# Altium PCB ADS1274.PcbDoc (part 1 of 2)
Units mil, origin at the board's own origin, x right, y up, seen from the top; angles counter-clockwise.
Board outline 3553.34 x 2765.94 mil, 2 copper layers (Top Layer, Bottom Layer); 108 components, 70 nets, 358 pads, 1184 vias.
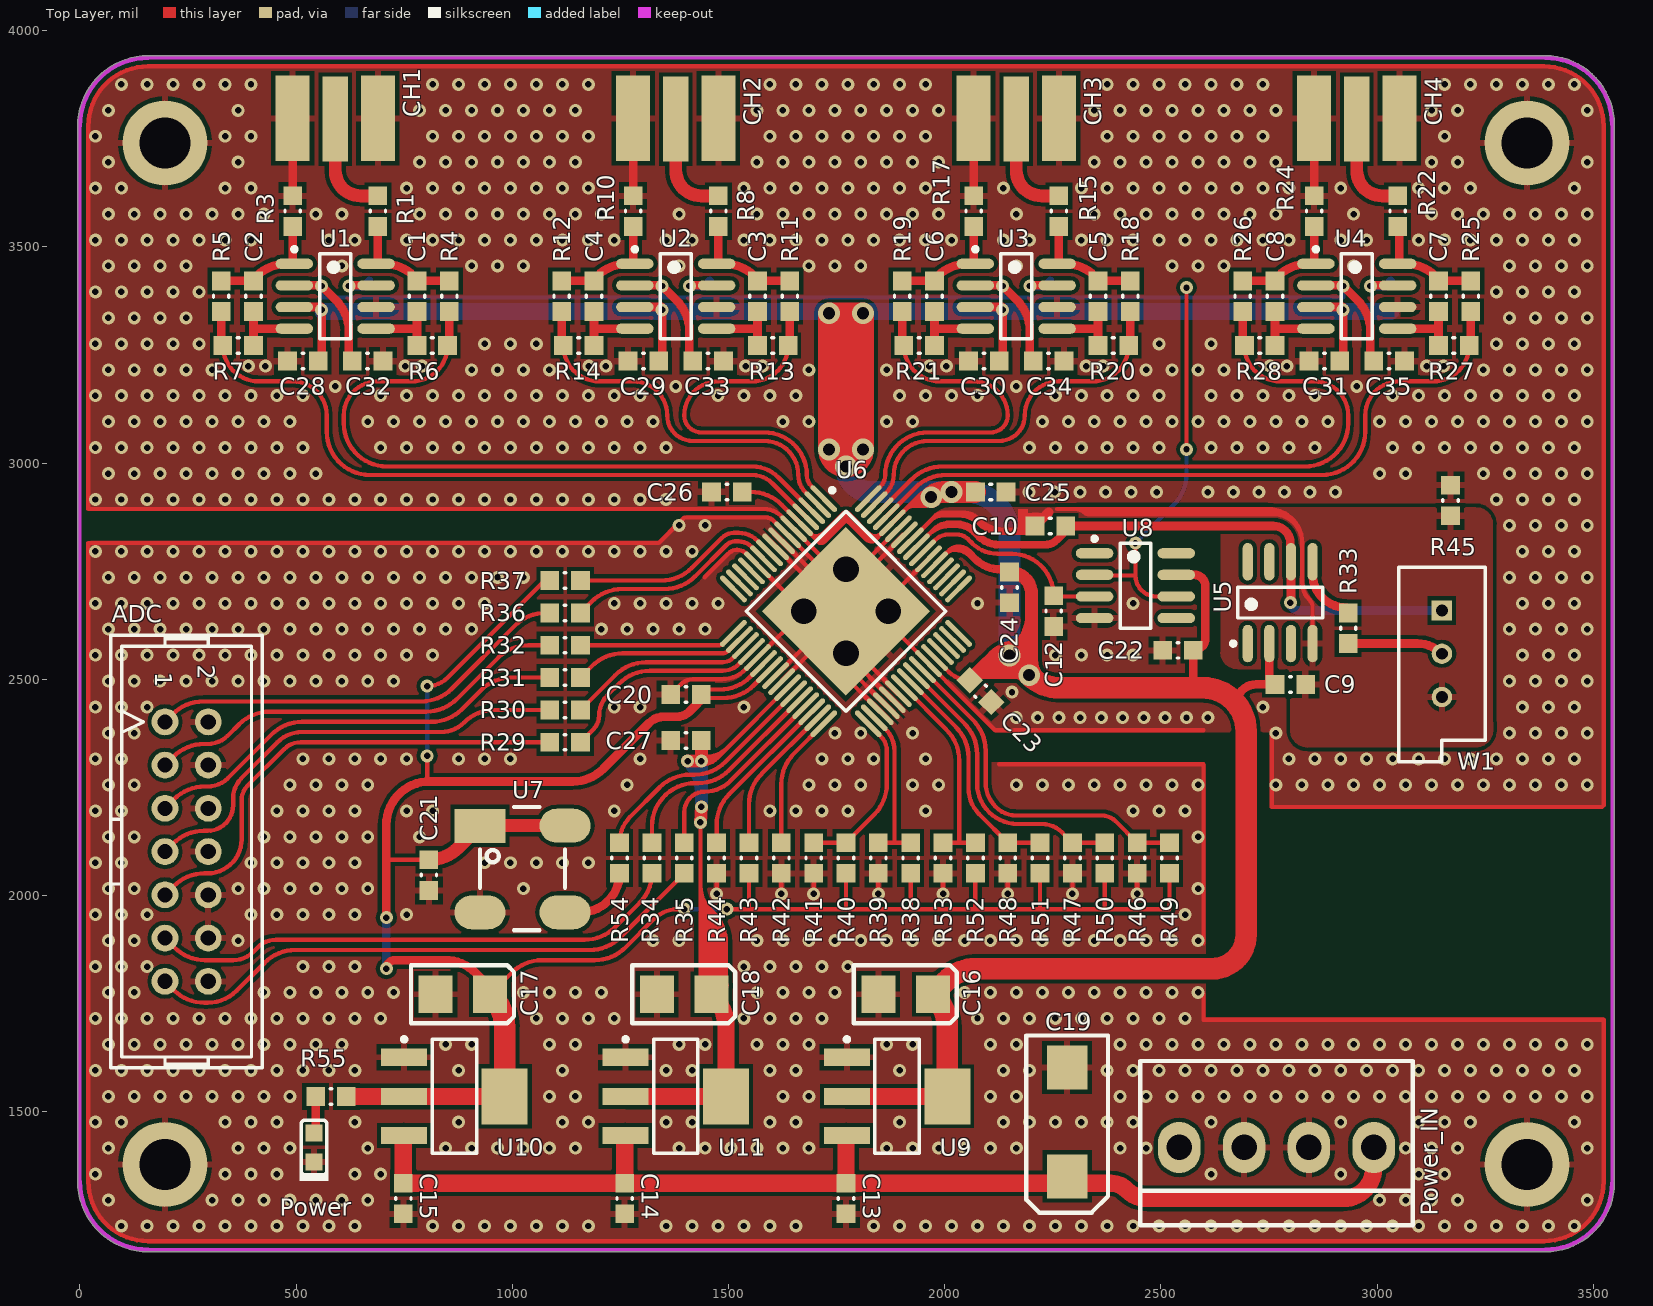
[diagram p0: Top Layer view]
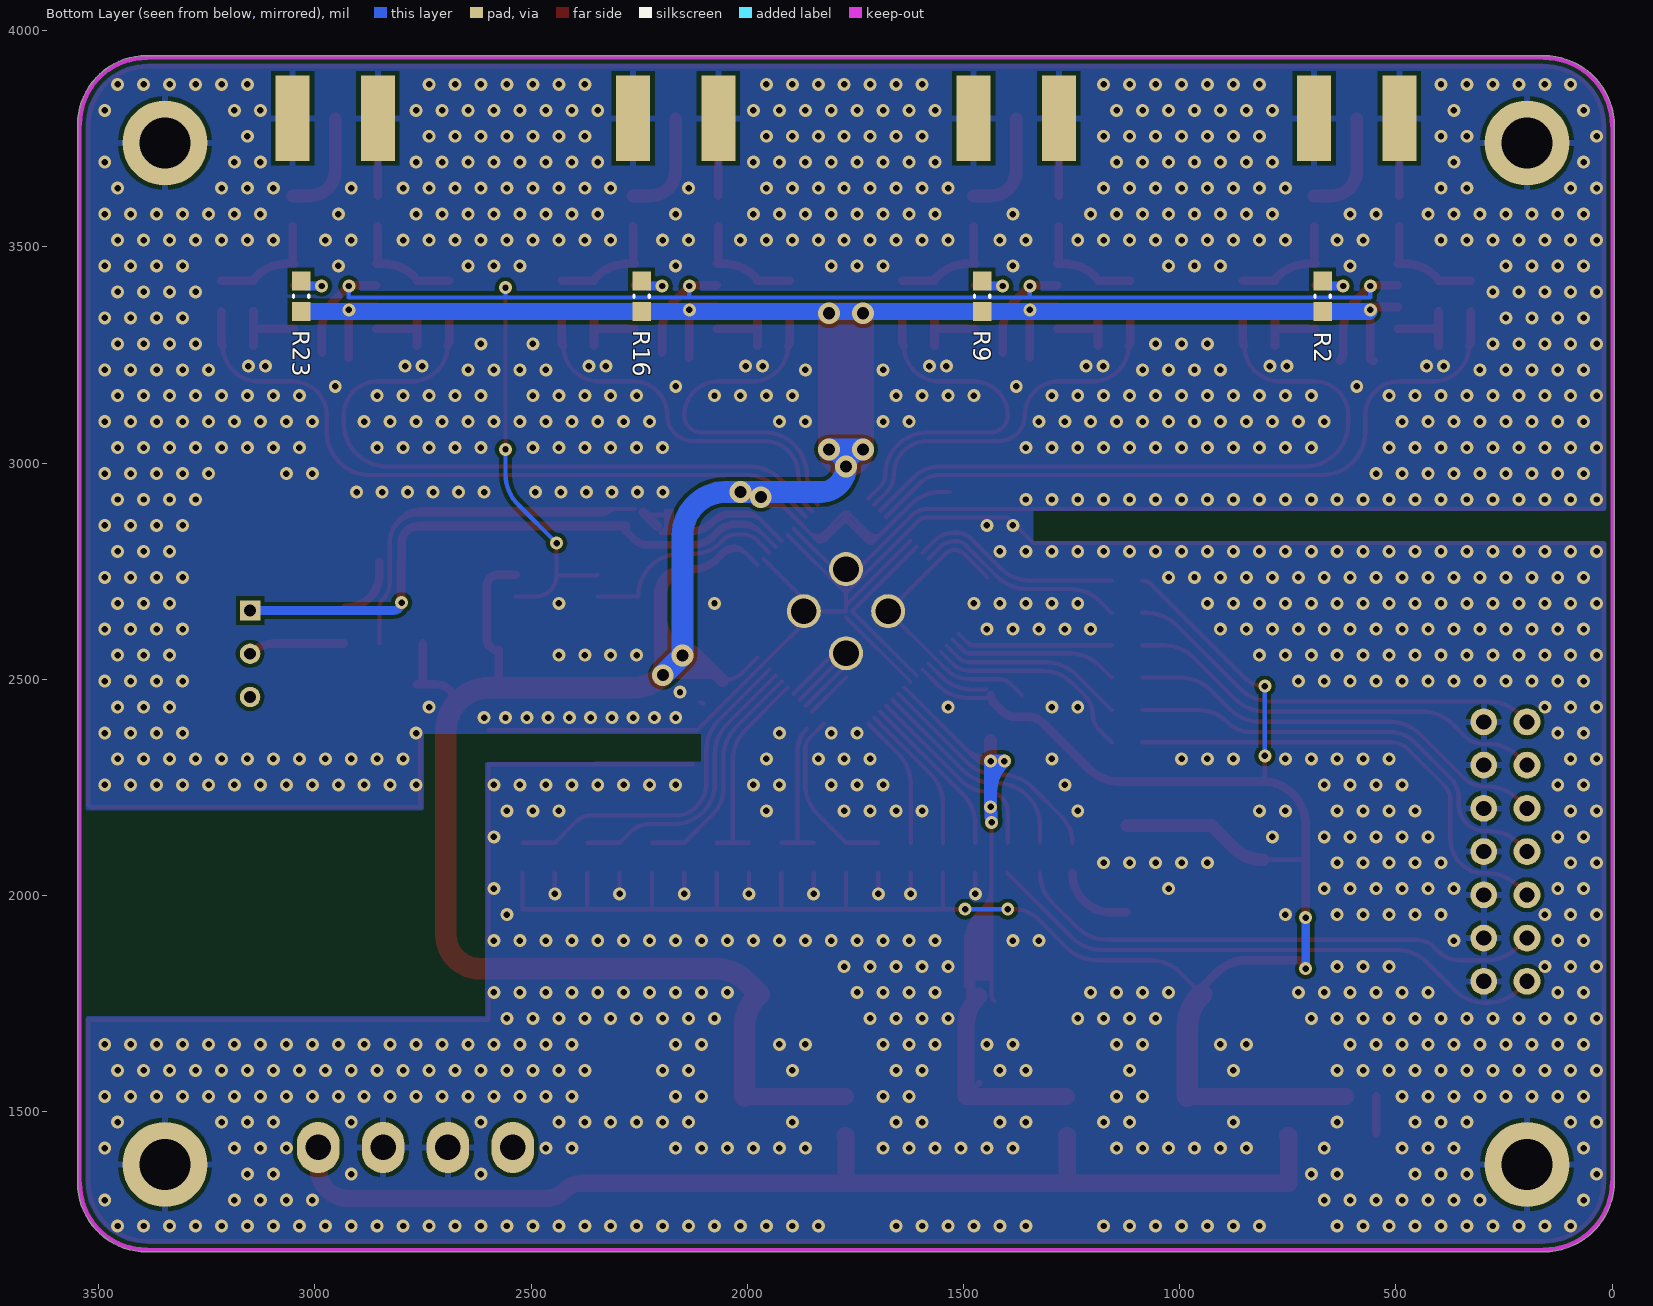
[diagram p1: Bottom Layer view, seen from below]

## Layer stack, top to bottom
Top Solder: solder mask 0.4, Solder Resist, Dk 3.5
Top Layer: signal copper 1.4
Dielectric 1: dielectric 12.6, FR-4, Dk 4.8
Bottom Layer: signal copper 1.4
Bottom Solder: solder mask 0.4, Solder Resist, Dk 3.5

## Board outline
157.48,1176.09 cw(c157.48,1338.58) -5.01,1338.58 cw(c0,1338.58) -4.35,1341.09 -4.35,3777.02 cw(c0,3779.53) -5.01,3779.53 cw(c157.48,3779.53) 157.48,3942.02 cw(c157.48,3937.01) 159.98,3941.35 3385.83,3941.35 cw(c3385.83,3937.01) 3386.59,3941.29 cw(c3389.2,3937.01) 3389.2,3942.02 cw(c3389.2,3782.9) 3548.32,3782.9 cw(c3543.31,3782.9) 3547.65,3780.4 3547.65,1338.58 cw(c3543.31,1338.58) 3547.59,1337.82 cw(c3543.31,1335.21) 3548.32,1335.21 cw(c3389.2,1335.21) 3389.2,1176.09 cw(c3389.2,1181.1) 3386.7,1176.76 159.98,1176.76 cw(c157.48,1181.1)

## Design rules (kind name [scope] priority, off if disabled: settings)
Clearance [All] p1: gap=6 except(9: Arc-Poly Track-Poly SMDPad-Poly THPad-Poly Via-Poly Fill-Poly Poly-Poly Poly-Region Poly-Text)
HoleSize [All] p1: absolutevalues=TRUE maxlimit=99999 minlimit=12 maxpercent=80.000 minpercent=20.000
MinimumSolderMaskSliver [All] p1: minsoldermaskwidth=1
PolygonConnect PolygonConnect_1 [IsVia] p1: connectstyle=Direct reliefconductorwidth=10 reliefentries=4 polygonreliefangle="90 Angle" airgapwidth=10
PolygonConnect [All] p2: connectstyle=Relief reliefconductorwidth=15 reliefentries=4 polygonreliefangle="90 Angle" airgapwidth=10
RoutingVias [All] p1: holewidth=15 width=30 viastyle="Through Hole" minholewidth=12 minwidth=25 maxholewidth=28000 maxwidth=50000
SilkToSilkClearance [All] p1: silktosilkclearance=1
SilkToSolderMaskClearance [IsPad] p1: minsilkscreentomaskgap=1 clearancetoexposedcopper=TRUE
SolderMaskExpansion [All] p1: expansion=4
Width [All] p1: maxlimit=99999 minlimit=6 preferedwidth=10
26 further rules are at their usual default settings.

## Classes and differential pairs
component class ADS1274: ADC C9 C10 C12 C13 C14 C15 C16 C17 C18 C19 Power Power_IN R29 R30 R31 R32 R33 R34 R35 R36 R37 R38 R39 R40 R41 R42 R43 R44 R45 R46 R47 R48 R49 R50 R51 R52 R53 R54 R55 U5 U6 U7 U8 U9 U10 U11 W1
component class "Diff AMP Inputs": C1 C2 C3 C4 C5 C6 C7 C8 CH1 CH2 CH3 CH4 R1 R2 R3 R4 R5 R6 R7 R8 R9 R10 R11 R12 R13 R14 R15 R16 R17 R18 R19 R20 R21 R22 R23 R24 R25 R26 R27 R28 U1 U2 U3 U4
component class "Decoupling Caps": C20 C21 C22 C23 C24 C25 C26 C27 C28 C29 C30 C31 C32 C33 C34 C35

## Components (designator, comment, footprint, x,y, rotation, side; value= is the part's Value field where it differs from the comment)
ADC "Header 7X2" HEADER7X2 196.85,2401.57 r270 top
C1 "1.5nF" CAPC0603(1608)55_M 779.53,3385.83 r270 top
C2 "1.5nF" CAPC0603(1608)55_M 401.57,3385.83 r270 top
C3 "1.5nF" CAPC0603(1608)55_M 1566.93,3385.83 r270 top
C4 "1.5nF" CAPC0603(1608)55_M 1188.98,3385.83 r270 top
C5 "1.5nF" CAPC0603(1608)55_M 2354.33,3385.83 r270 top
C6 "1.5nF" CAPC0603(1608)55_M 1976.38,3385.83 r270 top
C7 "1.5nF" CAPC0603(1608)55_M 3141.73,3385.83 r270 top
C8 "1.5nF" CAPC0603(1608)55_M 2763.78,3385.83 r270 top
C9 "100nF" CAPC0603(1608)55_M 2799.21,2488.19 r180 top
C10 "100nF" CAPC0603(1608)55_M 2244.09,2854.33 r0 top
C12 "100nF" CAPC0603(1608)55_M 2251.97,2657.48 r90 top
C13 "100nF" CAPC0603(1608)55_M 1771.65,1299.21 r90 top
C14 "100nF" CAPC0603(1608)55_M 1259.84,1299.21 r90 top
C15 "100nF" CAPC0603(1608)55_M 748.03,1299.21 r90 top
C16 "10uF" CAPC3528 1909.45,1771.65 r180 top
C17 "10uF" CAPC3528 885.83,1771.65 r180 top
C18 "10uF" CAPC3528 1397.64,1771.65 r180 top
C19 "100uF" CAPC7343 2283.46,1476.38 r90 top
C20 "100nF" CAPC0603(1608)55_M 1401.57,2464.57 r0 top
C21 "100nF" CAPC0603(1608)55_M 807.09,2047.24 r90 top
C22 "100nF" CAPC0603(1608)55_M 2539.37,2566.93 r0 top
C23 "100nF" CAPC0603(1608)55_M 2082.68,2472.44 r135 top
C24 "100nF" CAPC0603(1608)55_M 2149.61,2712.6 r90 top
C25 "100nF" CAPC0603(1608)55_M 2106.3,2933.07 r180 top
C26 "100nF" CAPC0603(1608)55_M 1496.06,2933.07 r0 top
C27 "100nF" CAPC0603(1608)55_M 1401.57,2358.27 r0 top
C28 "100nF" CAPC0603(1608)55_M 515.75,3236.22 r0 top
C29 "100nF" CAPC0603(1608)55_M 1303.15,3236.22 r0 top
C30 "100nF" CAPC0603(1608)55_M 2090.55,3236.22 r0 top
C31 "100nF" CAPC0603(1608)55_M 2877.94,3236.22 r0 top
C32 "100nF" CAPC0603(1608)55_M 665.35,3236.22 r180 top
C33 "100nF" CAPC0603(1608)55_M 1452.76,3236.22 r180 top
C34 "100nF" CAPC0603(1608)55_M 2240.16,3236.22 r180 top
C35 "100nF" CAPC0603(1608)55_M 3027.56,3236.22 r180 top
CH1 "SMA" SMA-V 590.55,3897.64 r270 top
CH2 "SMA" SMA-V 1377.95,3897.64 r270 top
CH3 "SMA" SMA-V 2165.35,3897.64 r270 top
CH4 "SMA" SMA-V 2952.76,3897.64 r270 top
Power "LED-BLUE" 0603LED_BLUE_V 541.34,1417.32 r90 top
Power_IN "Header 4" 3.96-4 2992.13,1417.32 r180 top
R1 "1K" RESC0603(1608)_M 688.98,3582.68 r270 top
R2 "1K" RESC0603(1608)_M 669.29,3385.83 r90 bottom
R3 "1K" RESC0603(1608)_M 492.13,3582.68 r270 top
R4 "1K" RESC0603(1608)_M 854.33,3385.83 r270 top
R5 "1K" RESC0603(1608)_M 326.77,3385.83 r270 top
R6 "49R9" RESC0603(1608)_M 814.96,3271.65 r0 top
R7 "49R9" RESC0603(1608)_M 366.14,3271.65 r180 top
R8 "1K" RESC0603(1608)_M 1476.38,3582.68 r270 top
R9 "1K" RESC0603(1608)_M 1456.69,3385.83 r90 bottom
R10 "1K" RESC0603(1608)_M 1279.53,3582.68 r270 top
R11 "1K" RESC0603(1608)_M 1641.73,3385.83 r270 top
R12 "1K" RESC0603(1608)_M 1114.17,3385.83 r270 top
R13 "49R9" RESC0603(1608)_M 1602.36,3271.65 r0 top
R14 "49R9" RESC0603(1608)_M 1153.54,3271.65 r180 top
R15 "1K" RESC0603(1608)_M 2263.78,3582.68 r270 top
R16 "1K" RESC0603(1608)_M 2244.09,3385.83 r90 bottom
R17 "1K" RESC0603(1608)_M 2066.93,3582.68 r270 top
R18 "1K" RESC0603(1608)_M 2429.13,3385.83 r270 top
R19 "1K" RESC0603(1608)_M 1901.57,3385.83 r270 top
R20 "49R9" RESC0603(1608)_M 2389.76,3271.65 r0 top
R21 "49R9" RESC0603(1608)_M 1940.94,3271.65 r180 top
R22 "1K" RESC0603(1608)_M 3047.24,3582.68 r270 top
R23 "1K" RESC0603(1608)_M 3031.5,3385.83 r90 bottom
R24 "1K" RESC0603(1608)_M 2854.33,3582.68 r270 top
R25 "1K" RESC0603(1608)_M 3216.54,3385.83 r270 top
R26 "1K" RESC0603(1608)_M 2688.98,3385.83 r270 top
R27 "49R9" RESC0603(1608)_M 3177.17,3271.65 r0 top
R28 "49R9" RESC0603(1608)_M 2728.35,3271.65 r180 top
R29 "1K" RESC0603(1608)_M 1122.05,2354.33 r0 top
R30 "1K" RESC0603(1608)_M 1122.05,2429.13 r0 top
R31 "1K" RESC0603(1608)_M 1122.05,2503.94 r0 top
R32 "1K" RESC0603(1608)_M 1122.05,2578.74 r0 top
R33 "10K" RESC0603(1608)_M 2933.07,2618.11 r270 top
R34 "1K" RESC0603(1608)_M 1322.83,2086.61 r270 top
R35 "1K" RESC0603(1608)_M 1397.64,2086.61 r270 top
R36 "1K" RESC0603(1608)_M 1122.05,2653.54 r180 top
R37 "1K" RESC0603(1608)_M 1122.05,2728.35 r180 top
R38 "1K" RESC0603(1608)_M 1921.26,2086.61 r270 top
R39 "1K" RESC0603(1608)_M 1846.46,2086.61 r270 top
R40 "1K" RESC0603(1608)_M 1771.65,2086.61 r270 top
R41 "1K" RESC0603(1608)_M 1696.85,2086.61 r270 top
R42 "1K" RESC0603(1608)_M 1622.05,2086.61 r270 top
R43 "1K" RESC0603(1608)_M 1547.24,2086.61 r270 top
R44 "1K" RESC0603(1608)_M 1472.44,2086.61 r270 top
R45 "0R" RESC0603(1608)_M 3169.29,2913.39 r270 top
R46 "1K" RESC0603(1608)_M 2444.88,2086.61 r90 top
R47 "1K" RESC0603(1608)_M 2295.28,2086.61 r90 top
R48 "1K" RESC0603(1608)_M 2145.67,2086.61 r90 top
R49 "1K" RESC0603(1608)_M 2519.68,2086.61 r270 top
R50 "1K" RESC0603(1608)_M 2370.08,2086.61 r270 top
R51 "1K" RESC0603(1608)_M 2220.47,2086.61 r270 top
R52 "1K" RESC0603(1608)_M 2070.87,2086.61 r270 top
R53 "1K" RESC0603(1608)_M 1996.06,2086.61 r90 top
R54 "49R9" RESC0603(1608)_M 1248.03,2086.61 r90 top
R55 "1K" RESC0603(1608)_M 580.71,1535.43 r0 top
U1 "THS4521" SOIC8 590.55,3385.83 r0 top
U2 "THS4521" SOIC8 1377.95,3385.83 r0 top
U3 "THS4521" SOIC8 2165.35,3385.83 r0 top
U4 "THS4521" SOIC8 2952.76,3385.83 r0 top
U5 "ADR441" SOIC8 2775.59,2677.17 r90 top
U6 "ADS1274" EQFP64 1771.65,2657.48 r315 top
U7 "27MHz" SMD7050 1122.05,2204.72 r270 top
U8 "OPAMP" SOIC8 2440.94,2716.54 r0 top
U9 "AMS1117-5.0" SOT-223_M 1889.76,1535.43 r0 top
U10 "AMS1117-3.3V" SOT-223_M 866.14,1535.43 r0 top
U11 "AMS1117-1.8V" SOT-223_M 1377.95,1535.43 r0 top
W1 "10K" VR5 3149.61,2559.06 r270 top

## Footprints (in the part's own frame and the unit in brackets; to place one, negate y for a bottom-side part, rotate by r counter-clockwise, add the part's x,y. Pads: shape width x height; smd on the part's side, far side on the other; paste and mask are expansions set on the pad)
3.96-4 [mm]
  oval 2.5x3 hole 1.5: 1(0,0) 2(3.81,0) 3(7.62,0) 4(11.43,0)
  silkscreen extent -2.29,-5.08 13.72,4.57, body extent -2.29,-5.08 13.72,4.44, height 10
0603LED_BLUE_V [mm] "SMT LED, 2-Leads, Body 1.6x0.8mm (0603-Size)"
  rect 1x1 smd paste+0 mask+0: 1(0.85,0) 2(-0.85,0)
  silkscreen extent -1.97,-0.85 1.6,0.85, body extent -0.92,-0.53 1.09,0.53, height 1.1
CAPC0603(1608)55_M [mm] "Chip Capacitor, Body 1.6x0.8mm, Height 0.55mm, IPC Low Density"
  rect 1.1x1.1 smd: 1(-0.9,0) 2(0.9,0)
  silkscreen extent -0.05,-0.45 0.05,0.45, body extent -0.87,-0.47 0.88,0.48, height 0.55
CAPC3528 [mm] "SMT Capacitor, 2 Leads, Body 3.5x2.8mm"
  rect 2x2.2 smd: 1(-1.6,0) 2(1.6,0)
  silkscreen extent -3,-1.7 3.05,1.7, body extent -1.79,-1.54 1.8,1.54, height 1.9
CAPC7343 [mm] "SMT Capacitor, 2 Leads, Body 7.3x4.3mm"
  rect 2.6x2.4 smd: 1(-3.202,0.007) 2(3.198,0.007)
  silkscreen extent -5.33,-2.39 5.08,2.41, body extent -3.49,-2.03 3.51,2.04, height 2.91
EQFP64 [mm] "QFP, 64-Leads, Body 10x10mm, Pitch 0.5mm, Thermal Pad 7x7mm, IPC Low Density"
  oval 2.1x0.3 smd: 1(-5.6,3.75) 2(-5.6,3.25) 3(-5.6,2.75) 4(-5.6,2.25) 5(-5.6,1.75) 6(-5.6,1.25) 7(-5.6,0.75) 8(-5.6,0.25) 9(-5.6,-0.25) 10(-5.6,-0.75) 11(-5.6,-1.25) 12(-5.6,-1.75) 13(-5.6,-2.25) 14(-5.6,-2.75) 15(-5.6,-3.25) 16(-5.6,-3.75) 33(5.6,-3.75) 34(5.6,-3.25) 35(5.6,-2.75) 36(5.6,-2.25) 37(5.6,-1.75) 38(5.6,-1.25) 39(5.6,-0.75) 40(5.6,-0.25) 41(5.6,0.25) 42(5.6,0.75) 43(5.6,1.25) 44(5.6,1.75) 45(5.6,2.25) 46(5.6,2.75) 47(5.6,3.25) 48(5.6,3.75)
  oval 0.3x2.1 smd: 17(-3.75,-5.6) 18(-3.25,-5.6) 19(-2.75,-5.6) 20(-2.25,-5.6) 21(-1.75,-5.6) 22(-1.25,-5.6) 23(-0.75,-5.6) 24(-0.25,-5.6) 25(0.25,-5.6) 26(0.75,-5.6) 27(1.25,-5.6) 28(1.75,-5.6) 29(2.25,-5.6) 30(2.75,-5.6) 31(3.25,-5.6) 32(3.75,-5.6) 49(3.75,5.6) 50(3.25,5.6) 51(2.75,5.6) 52(2.25,5.6) 53(1.75,5.6) 54(1.25,5.6) 55(0.75,5.6) 56(0.25,5.6) 57(-0.25,5.6) 58(-0.75,5.6) 59(-1.25,5.6) 60(-1.75,5.6) 61(-2.25,5.6) 62(-2.75,5.6) 63(-3.25,5.6) 64(-3.75,5.6)
  rect 7x7 smd: 65(0,0)
  silkscreen extent -5.72,-4.15 4.15,4.57, body extent -5,-5 5,5, height 1.2
HEADER7X2 [mil]
  round 62 hole 35: 1(0,0) 2(0,100) 3(100,0) 4(100,100) 5(200,0) 6(200,100) 7(300,0) 8(300,100) 9(400,0) 10(400,100) 11(500,0) 12(500,100) 13(600,0) 14(600,100)
  silkscreen extent -200,-125 800,225
RESC0603(1608)_M [mm] "Chip Resistor, Body 1.6x0.8mm, IPC Low Density"
  rect 1.1x1.1 smd: 1(-0.9,0) 2(0.9,0)
  silkscreen extent -0.05,-0.45 0.05,0.45, body extent -0.85,-0.47 0.85,0.47, height 0.6
SMA-V [mm]
  rect 5x1.5 smd: 1(2.6,0)
  rect 5x2 smd: 2(2.55,2.5) 2(2.55,-2.5)
  rect 5x2 smd far side: 2(2.55,2.5) 2(2.55,-2.5)
SMD7050 [mm]
  rect 2x3 smd: 1(1.11,-5)
  oval 2x3 smd: 2(6.19,-5) 3(6.19,0) 4(1.1,0)
  silkscreen extent 0,-5 7.25,0
SOIC8 [mm] "SOIC, 8-Leads, Body 4.9x3.9mm, Pitch 1.27mm, IPC Medium Density"
  oval 2.2x0.6 smd: 1(-2.4,1.905) 2(-2.4,0.635) 3(-2.4,-0.635) 4(-2.4,-1.905) 5(2.4,-1.905) 6(2.4,-0.635) 7(2.4,0.635) 8(2.4,1.905)
  silkscreen extent -2.52,-2.5 0.9,2.88, body extent -2,-2.5 2,2.5, height 1.75
SOT-223_M [mm] "SOT223, 4-Leads, Body 6.5x3.5mm, Pitch 2.3mm, Lead Span 7mm, IPC Low Density"
  rect 2.7x1 smd: 1(-2.95,2.3) 2(-2.95,0) 3(-2.95,-2.3)
  rect 2.7x3.3 smd: 2(2.95,0)
  silkscreen extent -3.07,-3.35 1.3,3.47, body extent -1.85,-3.35 1.85,3.35, height 1.8
VR5 [mm]
  rect 1.2x1.2 hole 0.7: 1(-2.54,0)
  round 1.2 hole 0.7: 2(0,0) 3(2.54,0)
  silkscreen extent -5.08,-2.54 6.35,2.54

## Part data
ADC: "Header, 7-Pin, Dual row"
C1 C2 C3 C4 C5 C6 C7 C8 C9 C10 C12 C13 C14 C15 C20 C21 C22 C23 C24 C25 C26 C27 C28 C29 C30 C31 C32 C33 C34 C35: library part CAP
C16 C17 C18 C19: library part CAP-Pol
Power_IN: "Header, 4-Pin"
R1 R2 R3 R4 R5 R6 R7 R8 R9 R10 R11 R12 R13 R14 R15 R16 R17 R18 R19 R20 R21 R22 R23 R24 R25 R26 R27 R28 R29 R30 R31 R32 R33 R34 R35 R36 R37 R38 R39 R40 R41 R42 R43 R44 R45 R46 R47 R48 R49 R50 R51 R52 R53 R54 R55: library part RES
U5: library part ADR421
U7: library part OSC7050
U9 U10 U11: library part AMS1117
W1: library part RPot2, "Potentiometer"

## Free pads (board coordinates)
  round 78.74 hole 59.06: 0(1674.22,2657.48) 0(1771.65,2560.04) 0(1771.65,2754.92) 0(1869.09,2657.48)
  round 196.85 hole 118.11: 1(196.85,3740.16) 2(196.85,1377.95) 3(3346.46,1377.95) 4(3346.46,3740.16)

## Via types
v1: diameter 30, hole 15, Top Layer to Bottom Layer, tented both sides, 1175 vias
v2: diameter 50, hole 28, Top Layer to Bottom Layer, tented both sides, 9 vias

## Nets (pads, with @x,y where several pads share a name; then routed paths per layer and width w, separated by ;. In a path a pad name is that pad's centre, name@x,y a point inside that pad or via, vN(x,y) a via of type N, cw(c..) or ccw(c..) an arc to the next point about the centre after c; other vN are vias at no path point)
+1.8V: C18.1 C27.2 U6.26 U11.2 | length 2246.1
  Top Layer w10: C18.1@1429.13,1755.91 ccw(c1414.88,1770.16) 1435.04,1770.16 1435.04,1986.7 ; v1(1435.04,2169.29) 1435.04,2020.78 ; v1@1435.04,2302.17 ccw(c1435.04,2357.83) 1474.4,2318.47 1488.11,2332.18 cw(c1437.01,2383.32) v1(1437.01,2311.02) cw(c1439.38,2313.4) 1436.02,2313.4 1436.02,2320.87 1437.01,2320.87 1448.16,2320.87 ccw(c1448.16,2390) 1497.02,2341.09 ; U11.2@1466.3,1563.23 U11.2@1494.09,1535.43 ; C18.1@1484.25,1803.15 1484.25,1891.65 ccw(c1384.25,1891.65) 1481.79,1913.72 ; 1488.13,2332.2 1497.02,2341.09 ; C18.1@1496.06,1791.34 cw(c1500.81,1796.09) 1494.09,1796.09 1494.09,1889.68 ccw(c1394.09,1889.68) 1464.81,1960.39 1456.69,1968.5 cw(c1508.97,2020.78) 1435.04,2020.78 ; U6.26@1636.64,2480.7 1497.02,2341.09 ; 1435.04,1986.7 ccw(c1455.2,1986.7) 1440.94,1972.44 1469.14,1944.24 cw(c1438.62,1913.72) 1469.57,1943.81 ; 1435.04,1986.7 1435.04,1990.64 ; 1435.04,1990.64 ccw(c1455.2,1990.64) 1440.94,1976.38 1454.96,1962.36 cw(c1384.25,1891.65) 1469.57,1943.81 ; 1435.04,1990.64 1435.04,2020.78 ; 1469.57,1943.81 cw(c1438.62,1913.72) 1481.79,1913.72 ; 1469.57,1943.81 cw(c1384.25,1891.65) 1481.79,1913.72
  Top Layer w15: U11.2@1462.94,1566.59 U11.2@1466.3,1563.23
  Top Layer w30: v1(1405.51,2311.02) v1(1437.01,2311.02) 1437.01,2320.87 C27.2@1437.01,2358.27 ; v1(1435.04,2169.29) v1(1437.01,2204.72)
  Top Layer w40: U11.2@1261.81,1535.43 U11.2@1494.09,1535.43 1494.09,1696.77 ccw(c1394.09,1696.77) C18.1@1464.81,1767.48
  Bottom Layer w30: v1(1435.04,2169.29) v1(1437.01,2204.72) 1437.01,2238.11 ; 1437.01,2238.11 ccw(c1337.01,2238.11) 1407.72,2308.82 v1(1405.51,2311.02) v1(1437.01,2311.02) 1437.01,2238.11
+3.3V: C17.1 C20.2 C21.2 R37.2 R38.2 R40.2 R43.2 R49.2 R50.2 R51.2 R52.2 R55.2 U6.22 U6.23 U7.1 U7.4 U10.2 | length 5659.5
  Top Layer w10: 708.66,2082.68 C21.2@807.09,2082.68 ; 798.87,2263.3 ccw(c788.55,2273.62) 803.15,2273.62 v1(803.15,2322.83) ; v1(803.15,2484.25) ccw(c803.15,2550.79) 850.2,2503.74 1066.45,2719.99 cw(c1086.61,2699.83) R37.2@1086.61,2728.35 ; C17.1@948.82,1771.65 998.27,1821.1 cw(c1068.98,1750.39) 1068.98,1850.39 1190.86,1850.39 ccw(c1190.86,1950.39) 1261.57,1879.68 1326.77,1944.88 cw(c1383.8,1887.85) 1383.8,1968.5 v1(1397.64,1968.5) ; C20.2@1448.82,2456.69 1487.69,2456.69 ccw(c1487.69,2556.69) 1558.4,2485.98 U6.23@1594.88,2522.46 ; C20.2@1448.82,2476.38 1479.53,2476.38 ccw(c1479.53,2576.38) 1550.24,2505.67 U6.22@1580.96,2536.38 ; v1(1496.06,1968.5) 1547.24,1968.5 ; R43.2@1547.24,2051.18 1547.24,1968.5 ; R40.2@1771.65,2051.18 1771.65,1968.5 ; R38.2@1921.26,2051.18 1921.26,1968.5 ; R52.2@2070.87,2051.18 2070.87,1968.5 ; R51.2@2220.47,2051.18 2220.47,1968.5 ; R50.2@2370.08,2051.18 2370.08,1968.5 ; R49.2@2519.69,2051.18 2519.69,1968.5 2370.08,1968.5 ; 1547.24,1968.5 1771.65,1968.5 ; 1771.65,1968.5 1921.26,1968.5 ; 1921.26,1968.5 2070.87,1968.5 ; 2070.87,1968.5 2220.47,1968.5 ; 2220.47,1968.5 2370.08,1968.5
  Top Layer w20: v1(708.66,1830.71) cw(c728.35,1830.71) 728.35,1850.39 844.41,1850.39 cw(c844.41,1750.39) 915.12,1821.1 C17.1@940.94,1795.28 ; v1(708.66,1948.82) 708.66,2082.68 708.66,2163.78 cw(c808.66,2163.78) 798.87,2263.3 cw(c808.66,2163.78) 808.66,2263.78 1139.68,2263.78 ccw(c1139.68,2363.78) 1210.39,2293.07 1316.79,2399.47 ; 1316.8,2399.48 cw(c1350.39,2365.86) 1350.39,2413.39 1380.93,2413.39 ccw(c1380.93,2453.71) 1409.45,2425.2 1428.66,2444.4 ccw(c1408.49,2464.57) C20.2@1437.01,2464.57
  Top Layer w30: C21.2@807.09,2082.68 ccw(c807.09,2180.02) 875.92,2111.19 U7.1@926.15,2161.42 ; U7.1@925.2,2161.02 cw(c926.15,2160.07) U7.1@926.15,2161.42 ; U7.4@1122.05,2161.42 U7.1@926.15,2161.42
  Top Layer w40: R55.2@616.14,1535.43 U10.2@750,1535.43 U10.2@982.28,1535.43
  Top Layer w50: C17.1@948.82,1771.65 952.99,1767.48 cw(c882.28,1696.77) 982.28,1696.77 U10.2@982.28,1535.43
  Bottom Layer w10: v1(803.15,2322.83) v1(803.15,2484.25) ; v1(1397.64,1968.5) v1(1496.06,1968.5)
  Bottom Layer w20: v1(708.66,1830.71) v1(708.66,1948.82)
+5V: C9.2 C16.1 C22.2 C23.2 C24.2 C25.2 C26.2 C28.2 C29.2 C30.2 C31.2 R2.1 R9.1 R16.1 R23.1 U1.3 U2.3 U3.3 U4.3 U5.2 U6.5 U6.44 U6.53 U6.60 U8.7 U9.2 | length 11016
  Top Layer w10: C26.2@1531.5,2933.07 1552.08,2933.07 cw(c1552.08,2833.07) 1622.79,2903.78 U6.5@1664.47,2862.1 U6.5@1692.38,2834.19 ; 1710.97,2829.08 cw(c1733.91,2806.13) 1733.91,2838.58 ; 1911.07,2894.33 cw(c1928.55,2876.85) 1928.55,2901.57 ; v2@1952.76,2925.2 1929.55,2901.99 cw(c1928.55,2902.98) 1928.55,2901.57 ; v2@1959.95,2912.71 v2(1968.5,2921.26) ; U6.44@1976.27,2550.3 2008.89,2517.68 ccw(c2057.62,2566.42) C23.2@2057.62,2497.5 ; U6.53@1976.27,2764.66 U6.53@2001.77,2790.16 ; v2@1976.38,2909.45 cw(c1957.37,2928.46) 1957.37,2901.57 1928.55,2901.57 ; U6.5@1692.39,2834.18 ccw(c1700.79,2842.6) 1700.79,2830.71 ccw(c1700.79,2859.22) 1720.95,2839.06 1764.93,2883.04 ; U6.5@1692.39,2834.18 1706.2,2820.37 ; 1706.2,2820.37 ccw(c1706.2,2843.32) 1722.42,2827.09 1733.91,2838.58 ; 1706.2,2820.37 1710.91,2815.66 ; 1710.91,2815.66 ccw(c1712.6,2817.35) 1712.6,2814.96 ; 1710.91,2815.66 ccw(c1712.6,2817.35) 1712.6,2814.96 ; 1712.6,2814.96 ccw(c1712.6,2829.7) 1723.02,2819.28 1768.64,2864.89 cw(c1771.65,2861.88) 1771.65,2866.14 cw(c1771.65,2856.64) 1778.37,2863.36 1817.27,2824.47 ccw(c1830.71,2837.91) 1830.71,2818.9 ccw(c1830.71,2830.79) 1839.12,2822.38 ; 1733.91,2838.58 1771.65,2876.32 ; 1764.93,2883.04 cw(c1771.65,2876.32) 1771.65,2885.83 cw(c1771.65,2876.32) 1778.37,2883.04 1825.14,2836.28 ccw(c1838.58,2849.72) 1838.58,2830.71 ccw(c1838.58,2852.11) U6.60@1853.71,2836.97 ; 1764.93,2883.04 1771.65,2876.32 ; 1771.65,2876.32 1816.04,2831.94 ccw(c1839.12,2855.02) 1839.12,2822.38 ; 1839.12,2822.38 U6.60@1853.71,2836.97 ; U6.60@1853.71,2836.97 U6.60@1878.83,2862.1 1943.31,2926.57 cw(c1968.5,2901.38) 1968.5,2937.01 1964.57,2933.07 1964.57,2929.13 1942.99,2907.55 cw(c1928.55,2921.99) 1928.55,2901.57 ; 2113.84,2750.5 cw(c2135.91,2848.03) 2065.2,2777.32 2057.23,2785.29 ccw(c2023.62,2751.69) 2023.62,2799.21 ccw(c2023.62,2768.31) 2001.79,2790.18 2009.64,2798.04 cw(c2031.5,2776.18) 2031.5,2807.09 cw(c2031.5,2769.58) 2058.02,2796.1 2074.64,2779.48 ccw(c2122.05,2826.88) 2122.05,2759.84 cw(c2122.05,2721.82) 2148.93,2748.71 C24.2@2149.6,2748.04 ; 2113.84,2750.5 ccw(c2135.91,2848.03) 2135.91,2748.03 C24.2@2149.61,2748.03 ; 2113.84,2750.5 2143.65,2750.5 cw(c2143.65,2742.08) C24.2@2149.6,2748.04
  Top Layer w20: U1.3@496.06,3360.83 557.68,3360.83 559.06,3359.45 v1(559.06,3354.33) 559.06,3244.09 cw(c551.18,3244.09) C28.2@551.18,3236.22 ; U2.3@1283.46,3360.83 1345.08,3360.83 1346.46,3359.45 v1(1346.46,3354.33) C29.2@1346.46,3244.09 ; U3.3@2070.87,3360.83 2132.48,3360.83 2133.86,3359.45 v1(2133.86,3354.33) C30.2@2133.86,3244.09 ; U8.7@2535.43,2741.54 2577.36,2741.54 cw(c2577.36,2716.54) 2602.36,2716.54 2602.36,2594.49 cw(c2574.8,2594.49) C22.2@2574.8,2566.93 2574.8,2502.36 ccw(c2596.85,2502.36) 2596.85,2480.32 ; 2674.79,2442.97 cw(c2720.01,2442.97) 2720.01,2488.19 C9.2@2763.78,2488.19 cw(c2763.78,2501.38) 2750.59,2501.38 U5.2@2750.59,2582.68 ; U4.3@2858.27,3360.83 2919.88,3360.83 2921.26,3359.45 v1(2921.26,3354.33) C31.2@2921.26,3244.09
  Top Layer w30: C23.2@2057.62,2497.5 2075.34,2515.21 ; C24.2@2149.61,2748.03 cw(c2149.61,2696.85) 2200.79,2696.85 2200.79,2647.72 ; 2175.73,2537.94 cw(c2200.79,2537.94) 2200.79,2562.99 ; 2177.17,2527.56 ccw(c2175.73,2527.56) 2175.73,2528.99 2089.12,2528.99 ; 2075.34,2515.21 2089.12,2528.99 ; 2075.34,2515.21 2163.03,2515.21 cw(c2163.03,2436.86) 2197.68,2507.13 cw(c2163.03,2436.86) 2218.43,2492.26 2235,2488.09 ; 2089.12,2528.99 2112.84,2552.71 cw(c2171.5,2494.05) 2171.5,2577.01 ccw(c2100.79,2647.72) 2200.79,2647.72 ; 2200.79,2562.99 2200.79,2545.36 ccw(c2265.83,2545.36) 2235,2488.09 ; 2200.79,2562.99 2200.79,2647.72 ; 2235,2488.09 ccw(c2265.83,2545.36) 2265.83,2480.32 2235,2488.09
  Top Layer w40: U9.2@1773.62,1535.43 U9.2@2005.91,1535.43
  Top Layer w50: v2(1968.5,2921.26) cw(c1997.02,2892.75) 1997.02,2933.07 C25.2@2070.87,2933.07 ; U9.2@2005.91,1535.43 2005.91,1696.77 ccw(c1905.91,1696.77) 1976.62,1767.48 C16.1@1972.44,1771.65 2002.21,1801.42 cw(c2072.92,1730.71) 2072.92,1830.71 2618.11,1830.71 ccw(c2618.11,1909.45) 2696.85,1909.45 2696.85,2380.32 ccw(c2596.85,2380.32) 2674.79,2442.97 ccw(c2596.85,2380.32) 2596.85,2480.32 2265.83,2480.32 cw(c2265.83,2580.32) 2218.43,2492.26 cw(c2265.83,2580.32) 2197.68,2507.13 cw(c2265.83,2580.32) v2(2195.12,2509.6) 2177.17,2527.56 2175.73,2528.99 v2(2149.61,2555.12) ; v2(1771.65,2992.13) ccw(c1771.65,3031.5) v2(1811.02,3031.5) v2(1811.02,3346.46) 1771.65,3346.46 ; v2(1771.65,2992.13) cw(c1771.65,3031.5) v2(1732.28,3031.5) v2(1732.28,3346.46) 1771.65,3346.46 ; v2(1771.65,2992.13) 1771.65,3346.46
  Bottom Layer w40: v1@562.99,3350.39 R2.1@669.29,3350.39 R9.1@1456.69,3350.39 R16.1@2244.09,3350.39 R23.1@3031.5,3350.39
  Bottom Layer w50: v2(1968.5,2921.26) cw(c1997.02,2892.75) v2@1997.02,2933.07 ; v2(2195.12,2509.6) v2(2149.61,2555.12) 2149.61,2833.07 ccw(c2049.61,2833.07) 2049.61,2933.07 v2(2015.75,2933.07) v2@1997.02,2933.07 ; v2(1771.65,2992.13) cw(c1811.02,2992.13) v2(1811.02,3031.5) v2(1732.28,3031.5) cw(c1732.28,2992.13) v2(1771.65,2992.13) ; v2(1771.65,2992.13) ccw(c1830.71,2992.13) 1830.71,2933.07 v2@1997.02,2933.07
AINN1: R5.2 R7.2 U6.4 | length 1651.6
  Top Layer w10: R7.2@330.71,3271.65 ccw(c413.39,3271.65) 413.39,3188.98 492.13,3188.98 cw(c492.13,3110.24) 570.87,3110.24 570.87,3072.44 ccw(c670.87,3072.44) 670.87,2972.44 1555.12,2972.44 cw(c1555.12,2907.62) 1600.95,2953.46 U6.4@1678.39,2876.02
  Top Layer w20: R5.2@326.77,3350.39 326.77,3281.16 ccw(c340.21,3281.16) R7.2@330.71,3271.65
AINN2: R12.2 R14.2 U6.2 | length 878.6
  Top Layer w10: R14.2@1118.11,3271.65 ccw(c1200.79,3271.65) 1200.79,3188.98 1279.53,3188.98 cw(c1279.53,3110.24) 1358.27,3110.24 ccw(c1417.32,3110.24) 1417.32,3051.18 1582.68,3051.18 cw(c1582.68,2972.44) 1661.42,2972.44 ccw(c1718.81,2972.44) 1678.23,2931.86 U6.2@1706.23,2903.85
  Top Layer w20: R12.2@1114.17,3350.39 1114.17,3281.16 ccw(c1127.61,3281.16) R14.2@1118.11,3271.65
AINN3: R19.2 R21.2 U6.64 | length 843.4
  Top Layer w10: U6.64@1823.16,2917.77 1851.16,2945.78 ccw(c1824.5,2972.44) 1862.2,2972.44 cw(c1960.63,2972.44) 1960.63,3070.87 2106.3,3070.87 ccw(c2106.3,3110.24) 2145.67,3110.24 ccw(c2066.93,3110.24) 2066.93,3188.98 1988.19,3188.98 cw(c1988.19,3271.65) R21.2@1905.51,3271.65
  Top Layer w20: R19.2@1901.57,3350.39 1901.57,3281.16 ccw(c1915.02,3281.16) R21.2@1905.51,3271.65
AINN4: R26.2 R28.2 U6.62 | length 1607.4
  Top Layer w10: U6.62@1850.99,2889.93 1923.9,2962.84 cw(c1994.61,2892.13) 1994.61,2992.13 2833.07,2992.13 ccw(c2833.07,3092.13) 2933.07,3092.13 2933.07,3110.24 ccw(c2854.33,3110.24) 2854.33,3188.98 2775.59,3188.98 cw(c2775.59,3271.65) R28.2@2692.91,3271.65
  Top Layer w20: R26.2@2688.98,3350.39 2688.98,3281.16 ccw(c2702.42,3281.16) R28.2@2692.91,3271.65
AINP1: R4.2 R6.2 U6.3 | length 1608
  Top Layer w10: R6.2@850.39,3271.65 cw(c767.72,3271.65) 767.72,3188.98 688.98,3188.98 ccw(c688.98,3110.24) 610.24,3110.24 610.24,3092.13 ccw(c710.24,3092.13) 710.24,2992.13 1555.12,2992.13 cw(c1555.12,2907.62) 1614.87,2967.37 U6.3@1692.31,2889.93
  Top Layer w20: R6.2@850.39,3271.65 ccw(c840.89,3281.16) 854.33,3281.16 R4.2@854.33,3350.39
AINP2: R11.2 R13.2 U6.1 | length 843.4
  Top Layer w10: R13.2@1637.8,3271.65 cw(c1555.12,3271.65) 1555.12,3188.98 1476.38,3188.98 ccw(c1476.38,3110.24) 1397.64,3110.24 ccw(c1437.01,3110.24) 1437.01,3070.87 1582.68,3070.87 cw(c1582.68,2972.44) 1681.1,2972.44 ccw(c1718.81,2972.44) 1692.15,2945.78 U6.1@1720.15,2917.77
  Top Layer w20: R13.2@1637.8,3271.65 ccw(c1628.29,3281.16) 1641.73,3281.16 R11.2@1641.73,3350.39
AINP3: R18.2 R20.2 U6.63 | length 878.6
  Top Layer w10: U6.63@1837.07,2903.85 1865.08,2931.86 ccw(c1824.5,2972.44) 1881.89,2972.44 cw(c1960.63,2972.44) 1960.63,3051.18 2125.98,3051.18 ccw(c2125.98,3110.24) 2185.04,3110.24 cw(c2263.78,3110.24) 2263.78,3188.98 2342.52,3188.98 ccw(c2342.52,3271.65) R20.2@2425.2,3271.65
  Top Layer w20: R20.2@2425.2,3271.65 ccw(c2415.69,3281.16) 2429.13,3281.16 R18.2@2429.13,3350.39
AINP4: R25.2 R27.2 U6.61 | length 1650.1
  Top Layer w10: U6.61@1864.91,2876.02 1932.05,2943.15 cw(c2002.76,2872.44) 2002.76,2972.44 2872.44,2972.44 ccw(c2872.44,3072.44) 2972.44,3072.44 2972.44,3110.24 cw(c3051.18,3110.24) 3051.18,3188.98 3129.92,3188.98 ccw(c3129.92,3271.65) R27.2@3212.6,3271.65
  Top Layer w20: R27.2@3212.6,3271.65 ccw(c3203.09,3281.16) 3216.54,3281.16 R25.2@3216.54,3350.39
DOUT1: ADC.9 R29.1 | length 1104.1
  Top Layer w10: ADC.9@196.85,2001.57 217.17,2021.89 cw(c287.88,1951.18) 287.88,2051.18 295.28,2051.18 ccw(c295.28,2129.92) 374.02,2129.92 374.02,2220.47 cw(c421.54,2220.47) 387.94,2254.08 472.44,2338.58 cw(c510.46,2300.56) 510.46,2354.33 984.25,2354.33 R29.1@1086.61,2354.33
DOUT2: ADC.7 R30.1 | length 1041.9
  Top Layer w10: ADC.7@196.85,2101.57 215.59,2120.32 cw(c286.3,2049.61) 286.3,2149.61 295.28,2149.61 ccw(c295.28,2208.66) 354.33,2208.66 354.33,2224.41 cw(c420.86,2224.41) 373.82,2271.46 456.69,2354.33 cw(c513.72,2297.3) 513.72,2377.95 835.18,2377.95 ccw(c835.18,2452.7) 888.03,2399.84 cw(c958.74,2329.13) 958.74,2429.13 R30.1@1086.61,2429.13
DOUT3: ADC.5 R31.1 | length 994.9
  Top Layer w10: ADC.5@196.85,2201.57 217.95,2222.68 cw(c288.67,2151.97) 288.67,2251.97 295.28,2251.97 ccw(c295.28,2318.5) 342.32,2271.46 443.15,2372.29 cw(c513.86,2301.57) 513.86,2401.57 812.91,2401.57 ccw(c812.91,2501.57) 883.62,2430.86 927.4,2474.65 cw(c998.11,2403.94) 998.11,2503.94 R31.1@1086.61,2503.94
DOUT4: ADC.3 R32.1 | length 984.5
  Top Layer w10: ADC.3@196.85,2301.57 216.38,2321.1 cw(c287.09,2250.39) 287.09,2350.39 295.28,2350.39 ccw(c295.28,2416.93) 342.32,2369.88 368.35,2395.91 cw(c439.06,2325.2) 439.06,2425.2 801.1,2425.2 ccw(c801.1,2525.2) 871.81,2454.49 966.77,2549.45 cw(c1037.48,2478.74) 1037.48,2578.74 R32.1@1086.61,2578.74
DRDY: ADC.13 R35.2 | length 1328.3
  Top Layer w10: ADC.13@196.85,1801.57 217.17,1781.26 ccw(c287.88,1851.97) 287.88,1751.97 295.28,1751.97 ccw(c295.28,1847.02) 362.48,1779.81 427.4,1844.73 cw(c498.11,1774.02) 498.11,1874.02 1179.05,1874.02 ccw(c1179.05,1974.02) 1249.76,1903.31 R35.2@1397.64,2051.18